# Altium PCB PCB1.PcbDoc (part 2 of 2)
Units mil, origin at the board's own origin, x right, y up, seen from the top; angles counter-clockwise.
Board outline 3380 x 2390 mil, 2 copper layers (Top Layer, Bottom Layer); 80 components, 56 nets, 292 pads, 26 vias.
Unrouted connection lines stored in the file: 2.
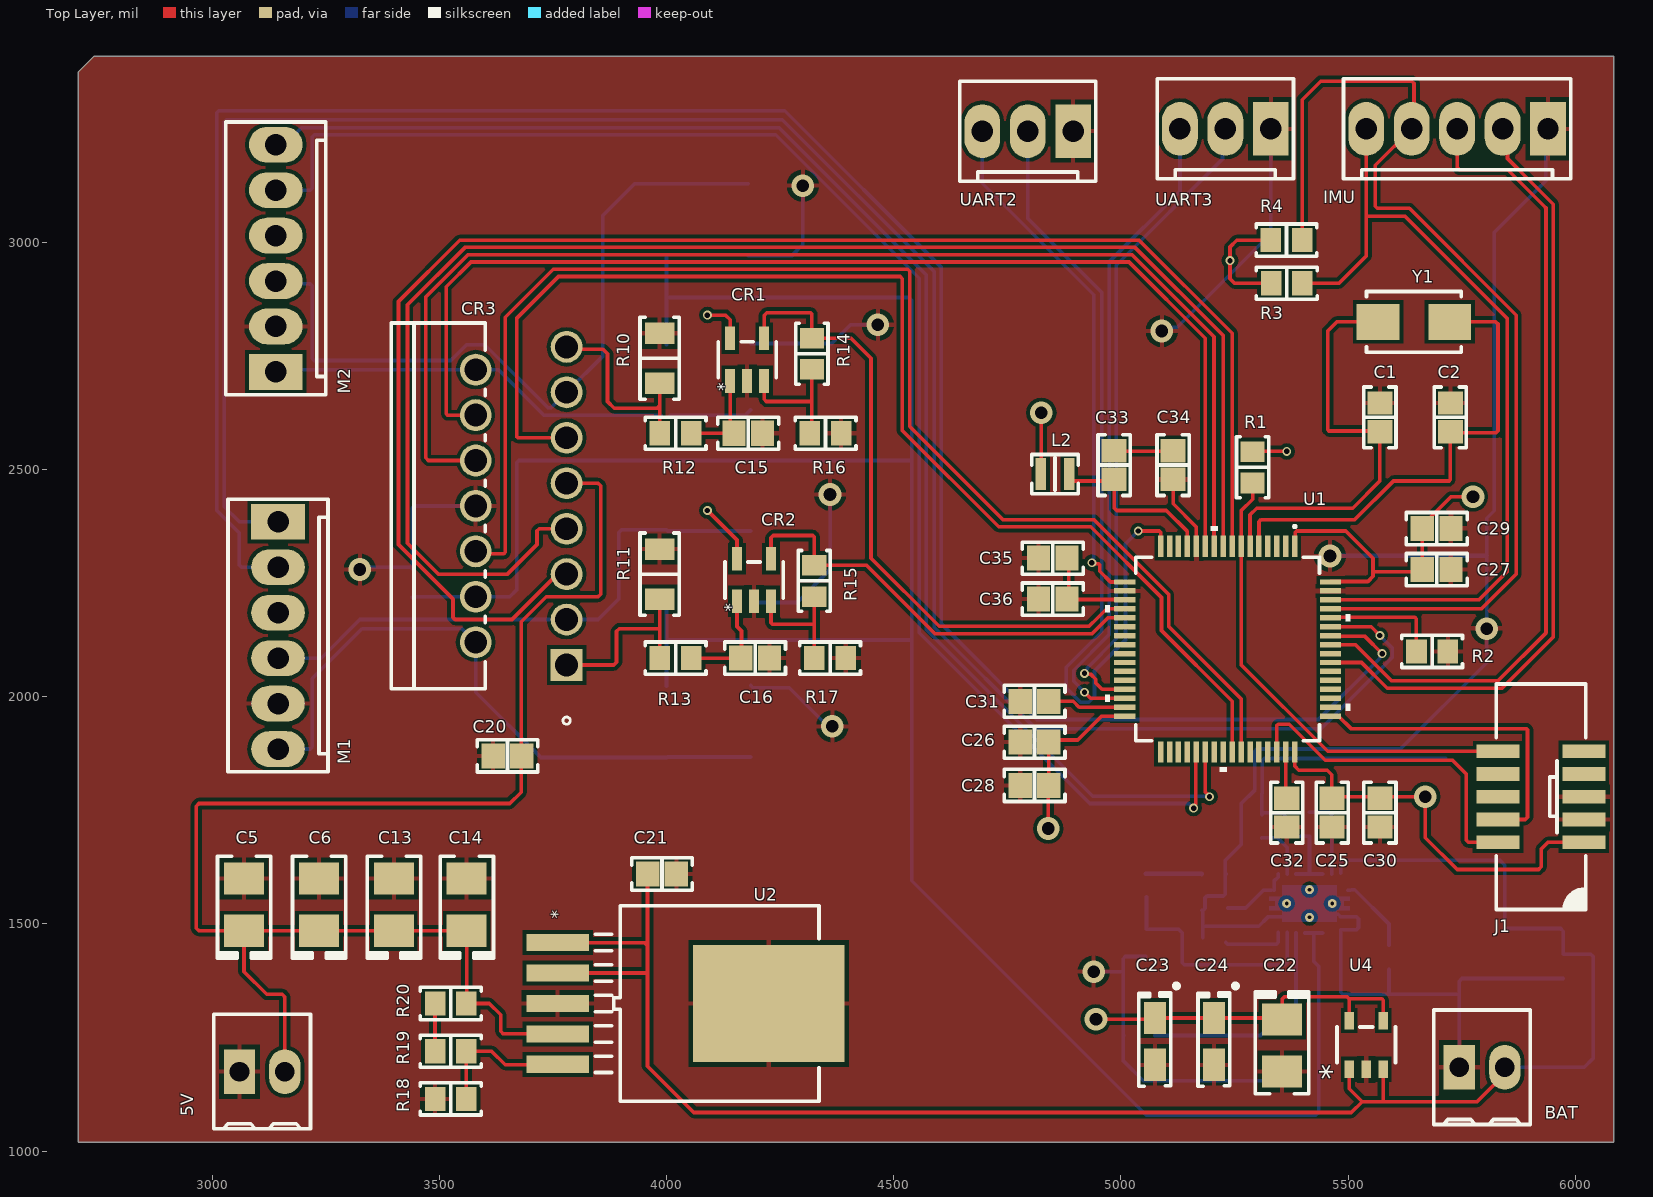
[diagram p0: Top Layer view]

## Part data (continued)
R14 R15: library part ERJ-6ENF5601V, "RES SMD 5.6K OHM 1% 1/8W 0805", Device Package="0805 (2012 Metric)", Manufacturer="Panasonic Electronic Components", Operating Temperature="-55°C ~ 155°C", Power (Watts)="0.125W, 1/8W", Ratings=AEC-Q200, Supplier Device Package=0805, Supplier Part Number 1=P5.60KCCT-ND, Temperature Coefficient=±100ppm/°C, Tolerance=±1%, ComponentLink1Description=Datasheet, ComponentLink1URL=https://industrial.panasonic.com/cdbs/www-data/pdf/RDA0000/AOA0000C304.pdf, ComponentLink2Description="DigiKey Link", ComponentLink2URL=http://digikey.com/product-detail/en/panasonic-electronic-components/ERJ-6ENF5601V/P5.60KCCT-ND/1746882, Composition="Thick Film", Features="Automotive AEC-Q200", Height - Seated (Max)="0.028\" (0.70mm)", LastUpdated="9/2/2020 1:15:09 AM", Lifecycle Status=Active, Minimum Order=1, Number of Terminations=2, Package / Case="0805 (2012 Metric)", Packaging=TapeAndReel, Part Number=ERJ-6ENF5601V, Part Status=Active, PartId=34762, Price=0.01, Resistance="5.6 kOhms", Series=ERJ, Size / Dimension="0.079\" L x 0.049\" W (2.00mm x 1.25mm)", Supplier 1=DigiKey
R16 R17: library part CRCW08051K00FKEA, "RES SMD 1K OHM 1% 1/8W 0805", Device Package="0805 (2012 Metric)", Manufacturer="Vishay Dale", Operating Temperature="-55°C ~ 155°C", Power (Watts)="0.125W, 1/8W", Ratings=AEC-Q200, Supplier Device Package=0805, Supplier Part Number 1=541-1.00KCCT-ND, Temperature Coefficient=±100ppm/°C, Tolerance=±1%, ComponentLink1Description=Datasheet, ComponentLink1URL=http://www.vishay.com/docs/20035/dcrcwe3.pdf, ComponentLink2Description="DigiKey Link", ComponentLink2URL=http://digikey.com/product-detail/en/vishay-dale/CRCW08051K00FKEA/541-1.00KCCT-ND/1180783, Composition="Thick Film", Features="Automotive AEC-Q200", Height - Seated (Max)="0.020\" (0.50mm)", LastUpdated="9/2/2020 1:15:23 AM", Lifecycle Status=Active, Minimum Order=1, Number of Terminations=2, Package / Case="0805 (2012 Metric)", Packaging=TapeAndReel, Part Number=CRCW08051K00FKEA, Part Status=Active, PartId=28103, Price=0.01, Resistance="1 kOhms", Series=CRCW, Size / Dimension="0.079\" L x 0.049\" W (2.00mm x 1.25mm)", Supplier 1=DigiKey
R18: library part CRGCQ0805F10K, "CRGCQ 0805 10K 1%", Device Package="0805 (2012 Metric)", Manufacturer="TE Connectivity Passive Product", Operating Temperature="-55°C ~ 155°C", Power (Watts)="0.125W, 1/8W", Ratings=AEC-Q200, Supplier Device Package=0805, Supplier Part Number 1=A129761CT-ND, Temperature Coefficient=±100ppm/°C, Tolerance=±1%, ComponentLink1Description=Datasheet, ComponentLink1URL=https://www.te.com/commerce/DocumentDelivery/DDEController?Action=srchrtrv&DocNm=1773204-3&DocType=DS&DocLang=English, ComponentLink2Description="DigiKey Link", ComponentLink2URL=http://digikey.com/product-detail/en/te-connectivity-passive-product/CRGCQ0805F10K/A129761CT-ND/8577593, Composition="Thick Film", Features="Automotive AEC-Q200, Moisture Resistant", Height - Seated (Max)="0.026\" (0.65mm)", LastUpdated="02.09.2020 1:14:36", Lifecycle Status=Active, Minimum Order=1, Number of Terminations=2, Package / Case="0805 (2012 Metric)", Packaging=TapeAndReel, Part Number=CRGCQ0805F10K, Part Status=Active, PartId=47653, Price=0.01, Resistance="10 kOhms", Series=CRGCQ, Size / Dimension="0.079\" L x 0.049\" W (2.00mm x 1.25mm)", Supplier 1=DigiKey
R19: library part TNPW08052K00FEEA, "RES 2K OHM 1% 1/8W 0805", Device Package="0805 (2012 Metric)", Manufacturer="Vishay Dale", Operating Temperature="-55°C ~ 155°C", Power (Watts)="0.2W, 1/5W", Ratings=AEC-Q200, Supplier Device Package=0805, Supplier Part Number 1=541-3918-1-ND, Temperature Coefficient=±25ppm/°C, Tolerance=±1%, ComponentLink1Description=Datasheet, ComponentLink1URL=http://www.vishay.com/docs/28758/tnpw_e3.pdf, ComponentLink2Description="DigiKey Link", ComponentLink2URL=http://digikey.com/product-detail/en/vishay-dale/TNPW08052K00FEEA/541-3918-1-ND/7355276, Composition="Thin Film", Features="Anti-Sulfur, Automotive AEC-Q200, Moisture Resistant", Height - Seated (Max)="0.022\" (0.55mm)", LastUpdated="02.09.2020 1:15:11", Lifecycle Status=Active, Minimum Order=1, Number of Terminations=2, Package / Case="0805 (2012 Metric)", Packaging=TapeAndReel, Part Number=TNPW08052K00FEEA, Part Status=Active, PartId=33621, Price=0.05, Resistance="2 kOhms", Series="TNPW e3", Size / Dimension="0.079\" L x 0.049\" W (2.00mm x 1.25mm)", Supplier 1=DigiKey
R20: library part RMCF0805FT30K0, "RES 30K OHM 1% 1/8W 0805", Device Package="0805 (2012 Metric)", Manufacturer="Stackpole Electronics Inc", Operating Temperature="-55°C ~ 155°C", Power (Watts)="0.125W, 1/8W", Ratings=AEC-Q200, Supplier Device Package=0805, Supplier Part Number 1=RMCF0805FT30K0CT-ND, Temperature Coefficient=±100ppm/°C, Tolerance=±1%, ComponentLink1Description=Datasheet, ComponentLink1URL=https://www.seielect.com/catalog/sei-rmcf_rmcp.pdf, ComponentLink2Description="DigiKey Link", ComponentLink2URL=http://digikey.com/product-detail/en/stackpole-electronics-inc/RMCF0805FT30K0/RMCF0805FT30K0CT-ND/7906793, Composition="Thick Film", Features="Automotive AEC-Q200", Height - Seated (Max)="0.026\" (0.65mm)", LastUpdated="02.09.2020 1:14:43", Lifecycle Status=Active, Minimum Order=1, Number of Terminations=2, Package / Case="0805 (2012 Metric)", Packaging=CutTape, Part Number=RMCF0805FT30K0, Part Status=Active, PartId=45910, Price=0.10, Resistance="30 kOhms", Series=RMCF, Size / Dimension="0.079\" L x 0.049\" W (2.00mm x 1.25mm)", Supplier 1=DigiKey
U2: "No Description Available", Mfr_Name=Microchip, Copyright="Copyright (C) 2022 Ultra Librarian. All rights reserved.", Manufacturer_Part_Number=MIC29302WU-TR, RefDes=RefDes, Type=DEV
U3: "No Description Available", Alternate_PartNumber=TPS61088RHLT, Manufacturer="Texas Instruments", CompType=IC, Copyright="Copyright (C) 2018 Accelerated Designs. All rights reserved", MountType=SMT, PackageReference=RHL0020A, PartNumber=TPS61088RHLR, PIN_COUNT=21, RefDes=RefDes, RoHS=Y, Type=DEV
UART2 UART3: "CONN HEADER VERT 3POS 2.54MM", Insulation Color=Natural, Manufacturer=Molex, Material Flammability Rating="UL94 V-0", Supplier Part Number 1=WM4112-ND, ComponentLink1Description=Datasheet, ComponentLink1URL=https://www.molex.com/pdm_docs/sd/022272031_sd.pdf, ComponentLink2Description="DigiKey Link", ComponentLink2URL=http://digikey.com/product-detail/en/molex/0022272031/WM4112-ND/1130578, Connector Type=Header, Contact Finish - Mating=Tin, Contact Finish - Post=Tin, Contact Finish Thickness - Mating="100.0µin (2.54µm)", Contact Length - Mating="0.295\" (7.49mm)", Contact Length - Post="0.140\" (3.56mm)", Contact Material=Brass, Contact Shape=Square, Contact Type="Male Pin", Fastening Type="Friction Lock", Insulation Height="0.461\" (11.70mm)", Insulation Material="Polyamide (PA), Nylon", LastUpdated="1/12/2020 11:51:54 PM", Lifecycle Status=Active, Minimum Order=1, Mounting Type="Through Hole", Number of Positions=3, Number of Positions Loaded=All, Number of Rows=1, Overall Contact Length="0.560\" (14.22mm)", Packaging=Bulk, Part Number=0022272031, Part Status=Active, PartId=77, Pitch - Mating="0.100\" (2.54mm)", Price=0.37, Series="KK 6410", Shrouding="Shrouded - 1 Wall", Style="Board to Cable/Wire", Supplier 1=DigiKey, Termination=Solder
Y1: library part NX5032GA-8MHZ-EXS00A-CG07039, "CRYSTAL 8MHZ 18PF SMD", ESR (Equivalent Series Resistance)="300 Ohms", Frequency Stability=±30ppm, Frequency Tolerance=±20ppm, Load Capacitance=18pF, Manufacturer="NDK America, Inc.", Operating Mode=Fundamental, Operating Temperature="-40°C ~ 85°C", Package / Case="2-SMD, No Lead", Supplier Part Number 1=644-1318-1-ND, ComponentLink1Description=Datasheet, ComponentLink1URL=//media.digikey.com/pdf/Data%20Sheets/NDK%20PDFs/NX5032GA-8MHz-EXS00A-CG07039.pdf, ComponentLink2Description="DigiKey Link", ComponentLink2URL=http://digikey.com/product-detail/en/ndk-america-inc/NX5032GA-8MHZ-EXS00A-CG07039/644-1318-1-ND/8275436, Frequency=8MHz, Height - Seated (Max)="0.059\" (1.50mm)", LastUpdated="02.09.2020 1:22:00", Lifecycle Status=Active, Minimum Order=1, Mounting Type="Surface Mount", Packaging=TapeAndReel, Part Number=NX5032GA-8MHZ-EXS00A-CG07039, Part Status=Active, PartId=609, Price=0.37, Series=NX5032GA, Size / Dimension="0.197\" L x 0.126\" W (5.00mm x 3.20mm)", Supplier 1=DigiKey, Type="MHz Crystal"

## Via types
v1: diameter 50, hole 28, Top Layer to Bottom Layer, tented both sides, 13 vias
v2: diameter 19.68, hole 11.81, Top Layer to Bottom Layer, tented both sides, 12 vias
v3: diameter 50, hole 27.99, Top Layer to Bottom Layer, tented both sides, 1 vias

## Nets (pads, with @x,y where several pads share a name; then routed paths per layer and width w, separated by ;. In a path a pad name is that pad's centre, name@x,y a point inside that pad or via, vN(x,y) a via of type N, cw(c..) or ccw(c..) an arc to the next point about the centre after c; other vN are vias at no path point)
+3.3v: C22.1 C23.1 C24.1 C25.2 C26.2 C27.2 C28.2 C29.2 C30.2 C35.2 C36.2 CR1.5 CR2.5 J1.1 L2.1 M1.4 M2.4 R1.2 R3.2 R4.2 U1.1 U1.19 U1.32 U1.48 U1.64 U4.4 U4.5 | length 3697.2
  Top Layer w8: v2(4090,2410) 4155,2345 4155,2304.2 CR2.5 ; v2(4090,2840) 4129.68,2840 4140,2829.68 4140,2789.2 CR1.5 ; L2.1 4825,2491.5 v1(4825,2625) ; v1(4840,1710) 4840,1803.5 C28.2 C26.2 4846.5,1905 4905,1905 4957.36,1957.36 U1.32 ; C36.2@4885,2308.5 C36.2 4885,2301.5 4885,2218.5 C35.2 4882.53,2213.97 5007.92,2213.97 U1.19 ; v3(4945,1290) 5071.85,1290 C23.1 C24.1 5351.81,1293.15 C22.1 5355,1335 5360,1340 5497.6,1340 5502.6,1335 ; R1.2 5290.55,2540 v2(5365,2540) ; R4.2 5255,3005 5240,2990 v2(5240,2960) 5240,2920 5250,2910 R3.2 ; U1.48 5382.36,1878.35 5382.36,1847.64 5391.5,1838.5 5454.05,1838.5 5464.05,1828.5 5464.05,1777.44 C25.2 5468.5,1780 5566.5,1780 C30.2 5573.5,1780 v1(5670,1780) 5670,1690 5740,1620 5919.14,1620 5925,1625.86 5925,1665 5940,1680 J1.1 ; U1.1 5383.41,2332.15 5383.41,2361.08 5387.32,2365 5495,2365 5555,2305 5555,2275 ; U1.64 5462.38,2253.64 5543.64,2253.64 5555,2265 5555,2275 ; U4.5 5502.6,1335 ; U4.4 5577.4,1332.12 5574.52,1335 5502.6,1335 ; C27.2@5663.5,2262.64 C27.2 ; C29.2@5663.5,2355 C27.2 ; C29.2 5663.5,2377.13 5726.38,2440 v1(5775,2440) ; 5555,2275 5658.5,2275 C27.2
+5v: 5V.1 C5.1 C6.1 C13.1 C14.1 C20.2 CR3.9 R20.2 U2.4 | length 3251.9
  Top Layer w8: 5V.1 3160,1339.14 3154.14,1345 3120,1345 3070,1395 C5.1 ; U2.4 3640.86,1258 3635,1263.86 3635,1300 3610,1325 R20.2 3560,1325.55 C14.1 C13.1 C6.1 C5.1 ; CR3.9@3790,2470 3849.14,2470 3855,2464.14 3855,2225.86 3849.14,2220 3735,2220 3680,2165 3680,1870 3680,1790 3655,1765 3465,1765 2970.86,1765 2965,1759.14 2965,1490.86 2970.86,1485 C5.1
+7.4v: BAT.1 C3.1 C4.1 C21.2 L1.2 U2.1 U2.2 U3.9 U4.1 U4.3 | length 4165.8
  Top Layer w8: U2.2 3958,1392 ; U2.1 3951,1459 3958,1452 ; C21.2@3963.5,1610 3958,1604.5 3958,1452 ; U4.1 5502.6,1137.4 5531.1,1108.9 ; U4.3 5577.4,1108.9 ; BAT.1 5845,1170 5783.9,1108.9 5577.4,1108.9 ; 3958,1392 3958,1187 4060,1085 5507.2,1085 5531.1,1108.9 ; 3958,1392 3958,1452 ; 5531.1,1108.9 5577.4,1108.9
  Bottom Layer w8: U3.9@5483.9,1611.89 5483.9,1640 5834.39,1640 5845,1629.39 5845,1565 C3.1 5967.58,1490 5973.44,1484.14 C4.1 6034.14,1433.15 6040,1427.29 6040,1205 6019.61,1184.61 BAT.1
+12v: C9.2 C19.2 CR3.4 D2.2 D3.2 D6.2 D7.2 R7.2 U3.14 U3.15 U3.16 | length 5680.9
  Bottom Layer w8: C19.2 3441.5,2220 CR3.4 3655,2220 3670,2235 3670,2515.31 3674.69,2520 4540,2520 ; D2.2 4000,2125 ; D6.2 4000,2125 ; D3.2 4000,2878.75 ; D7.2 4000,2878.75 ; U3.16 U3.15 ; U3.14 U3.15 ; 4000,2125 4540,2125 ; 4000,2878.75 4534.14,2878.75 4540,2872.89 4540,2520 ; 4540,2125 4540,2520 ; 4540,2125 4540,1595 5055.86,1079.14 5429.14,1079.14 5435.12,1085.12 C9.2 5435.12,1211.93 5435.59,1212.4 R7.2 5435.59,1406.34 5424.84,1417.09 U3.15
ENC1_A: M1.5 U1.58 | length 4878.1
  Top Layer w8: U1.58 5463.06,2132.84 5537.16,2132.84 v2(5575,2095)
  Bottom Layer w8: M1.5 3064.69,2285 3060,2289.69 3060,2360 3010,2410 3010,3285.31 3014.69,3290 4260,3290 4605,2945 4605,2160 4815,1950 5435,1950 5570.06,2085.06 5570.06,2086.89 5575,2091.84 v2(5575,2095)
ENC1_B: M1.6 U1.59 | length 4806.2
  Top Layer w8: U1.59 5550.79,2154.21 v2(5570,2135)
  Bottom Layer w8: M1.6 3060,2385 3026.78,2418.22 3026.78,3265.31 3031.47,3270 4255,3270 4589,2936 4589,2152.9 4811.9,1930 5440.89,1930 5596.84,2085.95 5596.84,2108.16 v2(5570,2135)
ENC2_A: M2.5 U1.37 | length 3333.4
  Top Layer w8: v2(5160,1755) 5160,1758.99 5165,1763.99 5165,1877.52 U1.37
  Bottom Layer w8: M2.5 3215.31,3115 3220,3119.69 3220,3232 3224.69,3236.69 4240.64,3236.69 4556,2921.33 4556,2140.65 4931.65,1765 5149.47,1765 5159.47,1755 v2(5160,1755)
ENC2_B: M2.6 U1.38 | length 3240.4
  Top Layer w8: U1.38 5185.79,1790.26 5195,1781.05 v2(5195,1780)
  Bottom Layer w8: M2.6 3159.68,3215 3197.37,3252.69 4247.27,3252.69 4572,2927.95 4572,2147.28 4938.28,1781 5194,1781 v2(5195,1780)
FSYNC: IMU.4 U1.55 | length 1724.9
  Top Layer w8: U1.55 5529.53,2075.47 5586,2019 5839,2019 5951.59,2131.59 5951.59,3083.74 5903.99,3131.34 5850.83,3184.5 5850.83,3239.17 IMU.4
GND: 5V.2 BAT.2 C1.1 C2.1 C3.2 C4.2 C5.2 C6.2 C8.1 C9.1 C10.1 C11.1 C12.1 C13.2 C14.2 C15.2 C16.1 C19.1 C20.1 C21.1 C22.2 C23.2 C24.2 C25.1 C26.1 C27.1 C28.1 C29.1 C30.1 C31.1 C32.1 C34.1 C35.1 C36.1 CR1.2 CR2.2 CR3.8 D1.1 D4.1 D5.1 D8.1 IMU.5 J1.2 J1.3 M1.2 M2.2 R2.1 R8.1 R9.2 R10.2 R11.1 R16.2 R17.2 R18.1 U1.12 U1.18 U1.63 U2.3 U2.6 U3.11 U3.12 U3.20 U3.21 U4.2 UART2.3 UART3.3 | length 6836
  Top Layer w8: C15.2@4206.5,2580 C15.2@4207.4,2579.09 ; C34.1@5115,2482.71 C34.1 5115,2425 5166.1,2373.9 U1.12 ; J1.2@5999.82,1731.36 J1.2@6003.46,1735
  Bottom Layer w8: v1(3325,2280) 3330,2285 3436.5,2285 C19.1 ; C19.1@3439.69,2289.69 3440,2290 3440,2414.14 3445.86,2420 CR3.8 ; D8.1 4276.26,2971.26 4300,2995 v1(4300,3125) ; D1.1 4190,2020 4270,2020 4355,1935 v1(4365,1935) ; D5.1 4287.52,2207.52 4360,2280 v1(4360,2445) ; D4.1 4363.74,2777.48 4405,2818.74 v1(4465,2818.74) ; v1(4940,1395) 5005,1395 ; R9.2@5004.8,1254.39 5004.8,1199.58 5049.39,1155 C9.1@5325,1155 ; R9.2 5005,1255.49 5005,1395 ; C8.1 5009.69,1428.43 5005,1423.74 5005,1395 ; v1(5090,2805) 5098.04,2813.04 5123.93,2813.04 5330,3019.11 UART3.3 ; C10.1 C10.1@5179.41,1529.02 ; R8.1@5180,1470 5180,1490.31 ; C10.1@5181.85,1530 5180,1528.15 5180,1490.31 ; C10.1@5185,1534.31 5185,1557 5189.69,1561.69 5225.31,1561.69 5230,1566.37 5230,1608.43 C12.1 ; C12.1@5230,1610 5230,1640 5265,1675 5265,1765 5295,1795 5295,1880.31 5299.69,1885 5615,1885 5805,2075 v1(5805,2150) 5805,2310.78 5805,2392.67 5822,2409.67 5822,3022 5935,3135 5935,3245 IMU.5 ; 5366.16,1515.47 U3.20 5323.66,1515.47 5322.54,1514.35 5303.19,1495 5184.69,1495 5180,1490.31 ; 5394.78,1544.09 5414.1,1544.09 U3.21 5415.91,1544.09 5435.22,1544.09 ; 5456.15,1523.16 5470,1523.16 5471.84,1521.31 5478.33,1521.31 5484.17,1515.47 U3.11 5518.41,1515.47 5523.09,1510.78 5523.09,1492.09 5518.41,1487.4 5484.57,1487.4 5483.9,1486.73 U3.12 5483.9,1349.69 5488.59,1345 5590,1345 ; C11.1 5590,1345 ; BAT.2 5745,1345 ; C4.2 5845,1380 5750.86,1380 5745,1374.14 5745,1345 ; 5590,1345 5745,1345
  Bottom Layer w10: v1(5460,2310) 5804.22,2310 5805,2310.78
INT: IMU.3 U1.57 | length 1803.8
  Top Layer w8: U1.57 5515.84,2114.84 5595.68,2035 5830,2035 5935.59,2140.59 5935.59,3075.9 5930.9,3080.59 5851.49,3160 5745,3160 5740,3165 IMU.3
M1_1: CR3.2 D1.2 D2.1 M1.1 | length 1420.3
  Bottom Layer w8: M1.1 3215.31,1885 3220,1889.69 3220,2040 3330,2150 3550,2150 CR3.2 3580,2010 3723.74,1866.26 D2.1 4001.26,1867.52 D1.2
M1_2: CR3.3 D5.2 D6.1 M1.3 | length 1258.1
  Top Layer w8: CR3.3@3770,2160 CR3.3
  Bottom Layer w8: M1.3 3240,2085 3325,2170 CR3.3 3850,2170 3895,2215 3895,2361.62 3900.86,2367.48 D6.1 4002.48,2365 D5.2
M1_EN: CR3.6 U1.42 | length 2988.5
  Top Layer w8: CR3.6@3590,2320 3595,2315 3642.12,2315 3645,2317.88 3645,2835 3751,2941 4530.31,2941 4535,2936.31 4535,2595 4740,2390 4940.36,2390 5105.29,2225.07 5105.29,2154.71 5264.53,1995.47 U1.42
M1_IN1: CR3.5 U1.8 | length 3482.8
  Top Layer w8: CR3.5 3763.22,2270 3760,2270 3660,2170 3534.69,2170 3530,2174.69 3530,2215 3410,2335 3410,2870 3545,3005 5040,3005 5244.84,2800.16 U1.8
M1_IN2: CR3.7 U1.9 | length 3363.6
  Top Layer w8: CR3.7@3790,2370 3719.69,2370 3715,2365.31 3715,2335 3650,2270 3497.63,2270 3430,2337.63 3430,2862.69 3556.31,2989 5031,2989 5225,2795 5225,2331.54 U1.9
M1_SENSE: CR3.1 R11.2 R13.2 | length 399.8
  Top Layer w8: CR3.1@3790,2070 3884.14,2070 3890,2075.86 3890,2144.14 3895.86,2150 3981.25,2150 3985,2146.25 ; R11.2 3985,2150 3985,2146.25 ; R13.2 3985,2085.55 3985,2146.25
M1_SENSE_I: CR2.4 R15.2 U1.21 | length 967.3
  Top Layer w8: CR2.4 4230,2350 4235,2355 4322.12,2355 4325,2352.12 R15.2 4440.29,2289.45 4590.74,2139 4936.63,2139 4971.52,2173.9 U1.21
M2_1: CR3.14 D3.1 D4.2 M2.1 | length 1073.3
  Bottom Layer w8: M2.1 3145,2720 3630,2720 3730.19,2619.81 3851.45,2619.81 3851.64,2620 D3.1@3988.74,2620 ; D3.1@4008.74,2620 4173.74,2620 D4.2@4185,2631.26
M2_2: CR3.13 D7.1 D8.2 M2.3 | length 1663.7
  Bottom Layer w8: M2.3 3146.37,2908.63 3215.31,2908.63 3220,2903.94 3220,2744.69 3224.69,2740 3525,2740 3560,2775 3600,2775 3739.19,2635.81 3745.81,2635.81 CR3.13 3860,2750 3860,3060 3928.74,3128.74 4020,3128.74 D8.2
M2_EN: CR3.11 U1.41 | length 2731.3
  Top Layer w8: CR3.11@3790,2570 3672.88,2570 3670,2572.88 3670,2832.69 3762.31,2925 4514.31,2925 4519,2920.31 4519,2586 4731,2374 4933.73,2374 5089.29,2218.44 5089.29,2145.71 5244.84,1990.16 U1.41
M2_IN1: CR3.10 U1.10 | length 2786.1
  Top Layer w8: CR3.10@3590,2520 3475.86,2520 3470,2525.86 3470,2880.06 3562.94,2973 5024.37,2973 5205,2792.37 5205,2331.85 U1.10
M2_IN2: CR3.12 U1.11 | length 2576.3
  Top Layer w8: CR3.12@3590,2620 3517.88,2620 3515,2622.88 3515,2902.43 3569.57,2957 5017.75,2957 5185.79,2788.96 U1.11
M2_SENSE: CR3.15 R10.1 R12.2 | length 425
  Top Layer w8: CR3.15@3790,2770 3795,2765 3860,2765 3870,2755 3870,2650 3885,2635 3979.14,2635 3985,2640.86 ; R10.1 3985,2640.86 ; R12.2 3985,2580.55 3985,2640.86
M2_SENSE_I: CR1.4 R14.2 U1.20 | length 1436.6
  Top Layer w8: CR1.4 4215,2839.14 4220.86,2845 4317.12,2845 4320,2842.12 R14.2 4405.55,2789.45 4450,2745 4450,2305 4600,2155 4930,2155 4950,2175 4968.58,2193.58 U1.20
NetC1_2: C1.2 U1.6 Y1.1 | length 957.4
  Top Layer w8: U1.6 5284.21,2400.31 5298.9,2415 5510,2415 5570,2475 C1.2 ; Y1.1 5475,2825 5455,2805 5455,2587.88 5457.88,2585 5544.9,2585 5559.95,2569.95 C1.2@5570,2580
NetC2_2: C2.2 U1.5 Y1.2 | length 1066.6
  Top Layer w8: U1.5 5303.9,2385.31 5308.58,2390 5515,2390 5600,2475 5722.12,2475 5725,2477.88 C2.2@5725,2581.09 ; Y1.2 5825.31,2825 5830,2820.31 5830,2585.42 5825.31,2580.73 C2.2@5725,2580.73
NetC7_1: C7.1 U3.8 | length 182.1
  Bottom Layer w8: C7.1 5458.55,1745.96 5464.41,1740.1 5464.41,1618.63 5464.21,1618.43 U3.8
NetC7_2: C7.2 L1.1 R5.2 U3.4 U3.5 U3.6 U3.7 | length 814
  Bottom Layer w8: U3.4 U3.5 5415,1609.96 U3.6 U3.7 ; 5415,1610 C7.2 5375.86,1692.81 5370,1698.67 5370,1729.39 5355,1744.39 5314.41,1744.39 R5.2 5310,1787.37 5311,1788.37 5311,1859.57 5315.69,1864.25 L1.1
NetC8_2: C8.2 R6.2 U3.18 | length 521
  Bottom Layer w8: R6.2@5056.38,1560 5056.38,1488.32 5126.68,1488.32 5135,1480 5135,1414.69 5139.69,1410 5361.1,1410 5365.79,1414.69 U3.18@5365.79,1481.97
NetC10_2: C10.2 U3.1 U3.2 | length 151
  Bottom Layer w8: C10.2@5235,1535 5275,1535 5314.52,1574.52 U3.1 ; U3.1@5336.89,1574.52 5337.17,1574.8 5337.17,1594.48 5346.11,1603.43 U3.2
NetC11_2: C11.2 U3.10 | length 168.5
  Bottom Layer w8: U3.10 5506.18,1574.52 5506.66,1575 5515,1575 5590,1500 C11.2
NetC12_2: C12.2 R6.1 | length 123.7
  Bottom Layer w10: R6.1 5177.83,1610.59 C12.2
NetC15_1: C15.1 CR1.1 R12.1 | length 210.4
  Top Layer w8: R12.1@4049.45,2580 R12.1 4143.5,2580 4140.2,2583.31 CR1.1
NetC16_2: C16.2 CR2.1 R13.1 | length 239.4
  Top Layer w8: R13.1 C16.2 4165,2086.5 4165,2145 4155.2,2154.8 CR2.1 CR2.1@4155.65,2209.55
NetC31_2: C31.2 U1.31 | length 172.5
  Top Layer w8: C31.2 4895,1990 4907.95,1977.05 U1.31
NetC32_2: C32.2 U1.47 | length 103
  Top Layer w8: U1.47 5362.95,1778.54 C32.2
NetC33_1: C33.1 C34.2 | length 96.8
  Top Layer w8: C33.1 C33.1@4986.5,2540 ; C33.1@4991.82,2540 5086.5,2540
NetC33_2: C33.2 L2.2 U1.13 | length 375
  Top Layer w8: L2.2@4886.5,2480 4891.5,2475 4985,2475 4985,2415.86 4990.86,2410 5100,2410 5146.42,2363.58 U1.13
NetCR1_3: CR1.3 R14.1 R16.1 | length 289.5
  Top Layer w8: CR1.3 4215,2655 4220,2650 4320,2650 ; R16.1 4320,2584.45 4320,2650 ; R14.1 4320,2650
NetCR2_3: CR2.3 R15.1 R17.1 | length 279.1
  Top Layer w8: CR2.3 4230,2162.88 4232.88,2160 4325,2160 ; R15.1 4325,2160 ; R17.1 4325,2085.55 4325,2160
NetR2_2: R2.2 U1.60 | length 262
  Top Layer w8: U1.60 5462.22,2174.74 5647.12,2174.74 5650,2171.86 R2.2@5650,2100
NetR5_1: R5.1 U3.3 | length 123.3
  Bottom Layer w8: R5.1 5310.59,1689.39 5345,1689.39 5365.79,1668.6 U3.3
NetR7_1: R7.1 R9.1 U3.17 | length 510.6
  Bottom Layer w8: R9.1 5307.46,1254.39 5350,1296.93 5384.41,1296.93 5385.48,1298 U3.17
NetR8_2: R8.2 U3.19 | length 141.6
  Bottom Layer w8: R8.2@5230.59,1459.39 5234.98,1455 5341.42,1455 5346.1,1459.69 U3.19@5346.1,1481.97
NetR18_2: R18.2 R19.1 U2.5 | length 316.1
  Top Layer w8: R19.1@3554.72,1215.28 3559.45,1210.55 R18.2 ; R19.1 3615,1220 3645,1190 3759.5,1190 U2.5
NetR19_2: R19.2 R20.1 | length 105
  Top Layer w8: R19.2 R20.1
NRST: J1.6 R1.1 U1.7 | length 1055
  Top Layer w8: R1.1 5290,2435 5264.53,2409.53 U1.7 5264.53,2070.47 5455,1880 J1.6
RX2: U1.17 UART2.1 | length 1158.4
  Top Layer w8: UART2.1@4690,3240 UART2.1 ; v2(4936.16,2295) 4937.16,2295 4939.39,2292.76 4951.29,2292.76 4953.74,2290.31 4953.74,2276.26 4977.36,2252.64 U1.17
  Bottom Layer w8: UART2.1 4695,3130 4940,2885 4940,2305.53 4938.39,2303.92 4938.39,2297.24 v2(4936.16,2295)
RX3: U1.30 UART3.1 | length 1441
  Top Layer w8: v2(4920,2010) 4933.27,1996.73 U1.30
  Bottom Layer w8: v2(4920,2010) 4896,2034 4896,2058.37 4974,2136.37 4974,2956.88 5130,3112.88 UART3.1
SCL1: IMU.2 R4.1 U1.61 | length 2299.7
  Top Layer w8: R4.1 5398.9,3313.9 5440,3355 5640.31,3355 5645,3350.31 5645,3255 IMU.2 5640,3249.46 5602.38,3211.83 5601.83,3211.83 5560,3170 5560,3079.69 5564.69,3075 5635,3075 5870,2840 5870,2270 5793.58,2193.58 U1.61
SDA1: IMU.1 R3.1 U1.62 | length 1821
  Top Layer w8: R3.1 5480,2910 5540,2970 5540,3055 5540,3057.88 ; U1.62 5788.27,2213.27 5850,2275 5850,2833.36 5625.48,3057.88 5540,3057.88 ; IMU.1 5540,3057.88
SWCLK: J1.9 U1.49 | length 705.3
  Top Layer w8: U1.49 5478.88,1957.36 5506.24,1930 5892.12,1930 5895,1927.12 5895,1735 5890,1730 J1.9
SWDIO: J1.10 U1.46 | length 738.7
  Top Layer w8: U1.46 5343.27,1936.73 5346.15,1939.62 5370.38,1939.62 5450,1860 5730,1860 5760,1830 5760,1684.69 5764.69,1680 J1.10
TX2: U1.16 UART2.2 | length 1890.8
  Top Layer w8: v2(5038.16,2365) 5084.48,2365 5087.36,2362.12 U1.16
  Bottom Layer w8: UART2.2 4795,3052.67 4958,2889.67 4958,2143 4880,2065 4880,2019.11 4910.95,1988.16 4929.05,1988.16 4941.84,2000.95 4941.84,2056.84 5010,2125 5010,2336.84 v2(5038.16,2365)
TX3: U1.29 UART3.2 | length 1435.1
  Top Layer w8: v2(4920,2051.48) 4922.24,2049.25 4934.27,2049.25 4944.67,2038.85 4944.67,2030.33 4958.58,2016.42 U1.29
  Bottom Layer w8: v2(4920,2051.48) 4920,2054.64 4925.84,2060.49 4925.84,2063.47 4990,2127.63 4990,2950 5223.63,3183.63 5223.63,3243.63 UART3.2
pads on no net: J1.4 J1.5 J1.7 J1.8 U1.2 U1.3 U1.4 U1.14 U1.15 U1.22 U1.23 U1.24 U1.25 U1.26 U1.27 U1.28 U1.33 U1.34 U1.35 U1.36 U1.39 U1.40 U1.43 U1.44 U1.45 U1.50 U1.51 U1.52 U1.53 U1.54 U1.56 U3.13 U3.V
copper on no net: | length 1.8
  Top Layer w8: 5008.15,2075 5008.62,2075.47 ; 5008.62,2055.79 5009.41,2055

## Polygon pours and split planes (outlines as drawn)
+3.3v on Bottom Layer "POWER_BOT_POLY" (solid, remove dead copper, pour order 1): 2705,1020 2705,3375 2740,3410 6085,3410 6085,1020
GND on Top Layer "GND_TOP_POLY" (solid, remove dead copper, pour order 0): 2705,1020 2705,3375 2740,3410 6085,3410 6085,1020

## Silkscreen, mask and mechanical layers (free items; w line width, h text height)
Board:
  the board outline again, w8

## Text inside footprints (layer, text, board x,y; h text height)
CR1: Top Overlay "*" at 4139.2,2672.5 h27.56 r90; Mechanical 13 "*" at 4159.2,2705 h27.56 r90; Mechanical 7 "Default Padstyle: RX52Y22D0T" at 4436.6,2392 h27.56 r90; Mechanical 7 "Alt 1 Padstyle: OX60Y90D30P" at 4556.6,2404.5 h27.56 r90; Mechanical 7 "Alt 2 Padstyle: OX90Y60D30P" at 4616.6,2404.5 h27.56 r90; Mechanical 7 "0.069in/1.753mm" at 4023.6,2648.25 h27.56 r90; Mechanical 7 "0.118in/2.997mm" at 3948.6,2648.25 h27.56 r90; Mechanical 7 "0.118in/2.997mm" at 4190.1,2896.5 h27.56 r90; Mechanical 7 "0.037in/0.95mm" at 4171.4,2400 h27.56 r90; Mechanical 7 "0.024in/0.61mm" at 4356.6,2607.5 h27.56 r90
CR2: Top Overlay "*" at 4154.2,2187.5 h27.56 r90; Mechanical 13 "*" at 4174.2,2220 h27.56 r90; Mechanical 7 "0.024in/0.61mm" at 4371.6,2122.5 h27.56 r90; Mechanical 7 "0.037in/0.95mm" at 4186.4,1915 h27.56 r90; Mechanical 7 "0.118in/2.997mm" at 4205.1,2411.5 h27.56 r90; Mechanical 7 "0.118in/2.997mm" at 3963.6,2163.25 h27.56 r90; Mechanical 7 "0.069in/1.753mm" at 4038.6,2163.25 h27.56 r90; Mechanical 7 "Alt 2 Padstyle: OX90Y60D30P" at 4631.6,1919.5 h27.56 r90; Mechanical 7 "Alt 1 Padstyle: OX60Y90D30P" at 4571.6,1919.5 h27.56 r90; Mechanical 7 "Default Padstyle: RX52Y22D0T" at 4451.6,1907 h27.56 r90
CR3: Mechanical 13 "TAB" at 3436.79,2401.25 h27.56 r90; Mechanical 7 "0.197in/5.004mm" at 3510.29,1765 h27.56 r90; Mechanical 7 "0.795in/20.193mm" at 3329.29,2320 h27.56 r90; Mechanical 7 "0.2in/5.08mm" at 3692.5,2887.5 h27.56 r90; Mechanical 7 "0.181in/4.59mm" at 3502.14,2887.5 h27.56 r90; Mechanical 7 "0.05in/1.27mm" at 3910,2013.75 h27.56 r90; Mechanical 7 "0.7in/17.78mm" at 4010,2338.75 h27.56 r90; Mechanical 7 "Alt 2 Padstyle: OX90Y60D30P" at 4295,2082.5 h27.56 r90; Mechanical 7 "Alt 1 Padstyle: OX60Y90D30P" at 4235,2082.5 h27.56 r90; Mechanical 7 "Pin 1 Padstyle: SX70Y70D50P" at 4175,2082.5 h27.56 r90; Mechanical 7 "Default Padstyle: OX70Y70D50P" at 4115,2057.5 h27.56 r90
L1: Mechanical 13 "*" at 5765,1887.26 h27.56 r90; Mechanical 7 "0.28in/7.1mm" at 6087.95,1830 h27.56 r90; Mechanical 7 "0.256in/6.5mm" at 5599.55,1495.24 h27.56 r90; Mechanical 7 "0.219in/5.55mm" at 5987.95,1842.5 h27.56 r90; Mechanical 7 "Alt 2 Padstyle: OX90Y60D30P" at 5385,2205 h27.56 r90; Mechanical 7 "Alt 1 Padstyle: OX60Y90D30P" at 5410,2220 h27.56 r90; Mechanical 7 "Default Padstyle: RX72p83Y133p86D0T" at 5210,2260 h27.56 r90; Bottom Overlay "*" at 5765,1947.26 h27.56 r90
U1: Mechanical 7 "0.394in/10.008mm" at 5222.5,2657.38 h27.56 r270; Mechanical 7 "0.394in/10.008mm" at 4857.62,2205 h27.56 r270; Mechanical 7 "0.453in/11.5mm" at 4880.12,2192.5 h27.56 r270; Mechanical 7 "0.453in/11.5mm" at 5222.5,1790.12 h27.56 r270; Mechanical 7 "0.02in/0.5mm" at 5360.3,2569.88 h27.56 r270; Mechanical 7 "Alt 2 Padstyle: OX90Y60D30P" at 4485.12,2442.5 h27.56 r270; Mechanical 7 "Alt 1 Padstyle: OX60Y90D30P" at 4545.12,2442.5 h27.56 r270; Mechanical 7 "Default Padstyle: RX47Y12D0T" at 4725.12,2455 h27.56 r270
U2: Top Overlay "*" at 3735.5,1530 h27.56 r270; Mechanical 13 "*" at 3888.5,1471.5 h27.56 r270
U4: Top Overlay "*" at 5487.6,1157.5 h50 r90; Mechanical 13 "*" at 5530.6,1196.75 h50 r90; Mechanical 7 "0.024in/0.61mm" at 5719.5,1099.25 h25 r90; Mechanical 7 "0.075in/1.9mm" at 5552.5,1407.5 h25 r90; Mechanical 7 "0.037in/0.95mm" at 5533.8,885 h25 r90; Mechanical 7 "0.119in/3.023mm" at 5552.5,1588.25 h25 r90; Mechanical 7 "0.118in/2.997mm" at 5310.5,1140 h25 r90; Mechanical 7 "0.069in/1.753mm" at 5385.5,1140 h25 r90; Mechanical 7 "Alt 2 Padstyle: OX90Y60D30P" at 6099.5,896.25 h50 r90; Mechanical 7 "Alt 1 Padstyle: OX60Y90D30P" at 6039.5,896.25 h50 r90; Mechanical 7 "Default Padstyle: RX38p5Y20D0T" at 5799.5,858.75 h50 r90; Mechanical 7 "Pin One Padstyle: RX38p5Y20D0T" at 5859.5,858.75 h50 r90